# Altium PCB DRTC_V2.PcbDoc
Units mm, origin at the board's own origin, x right, y up, seen from the top; angles counter-clockwise.
Board outline 46 x 80.7 mm, 2 copper layers (Top Layer, Bottom Layer); 27 components, 41 nets, 144 pads, 7 vias.
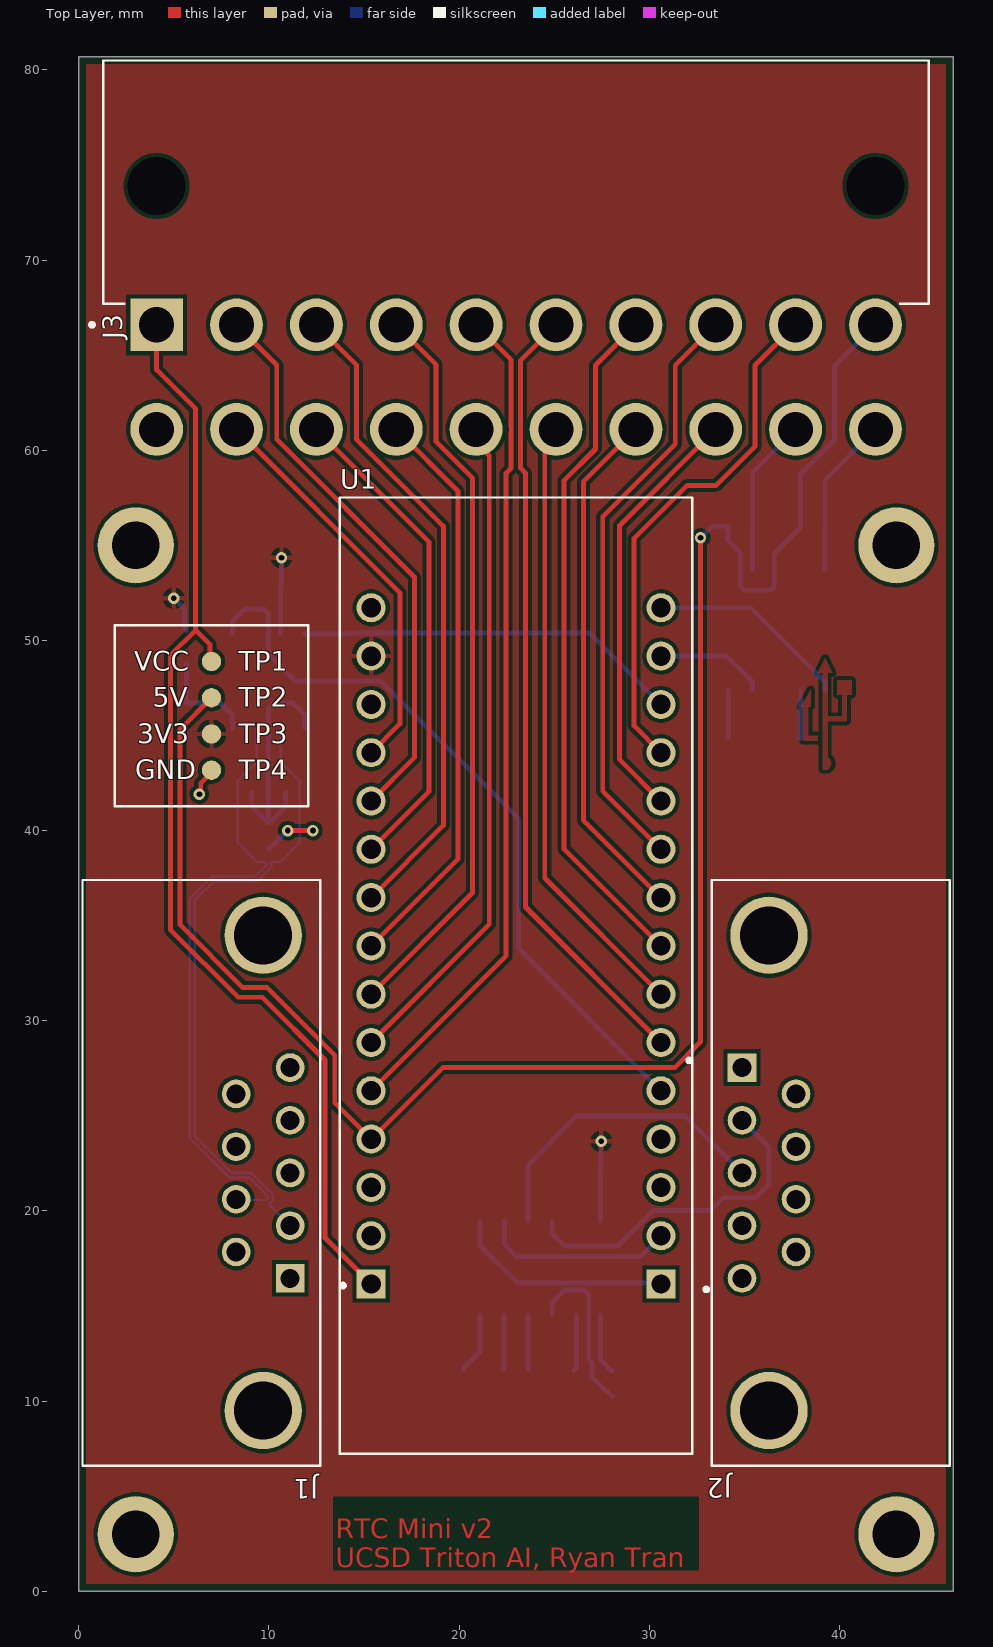
[diagram p0: Top Layer view]
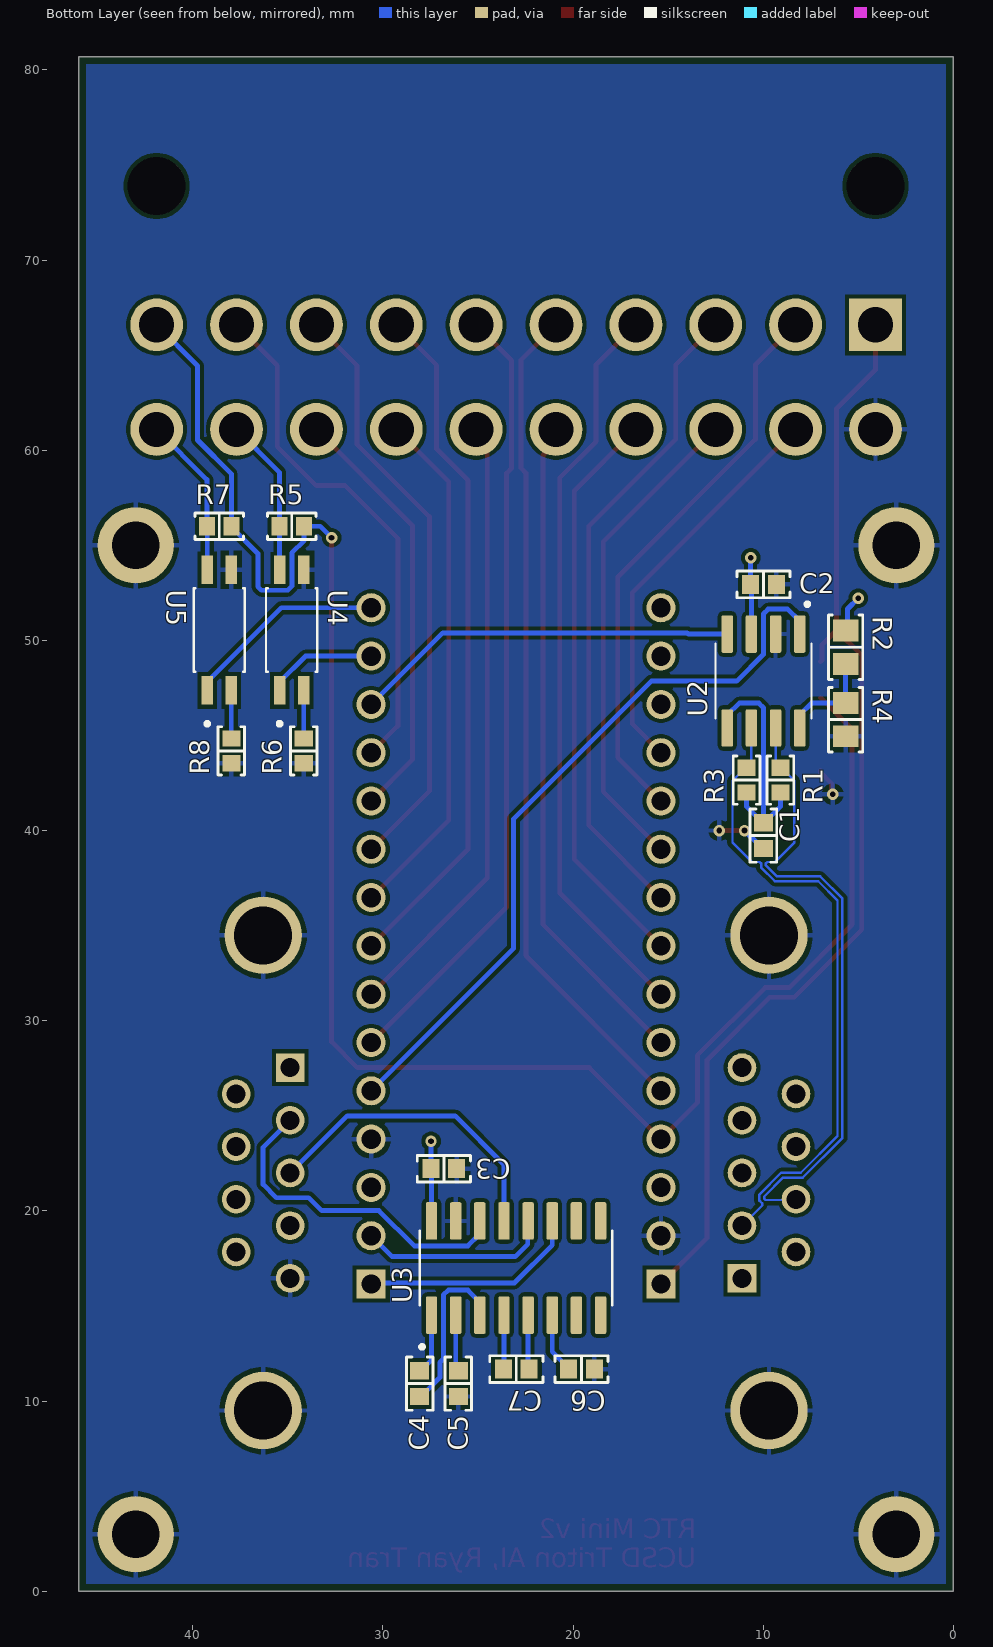
[diagram p1: Bottom Layer view, seen from below]
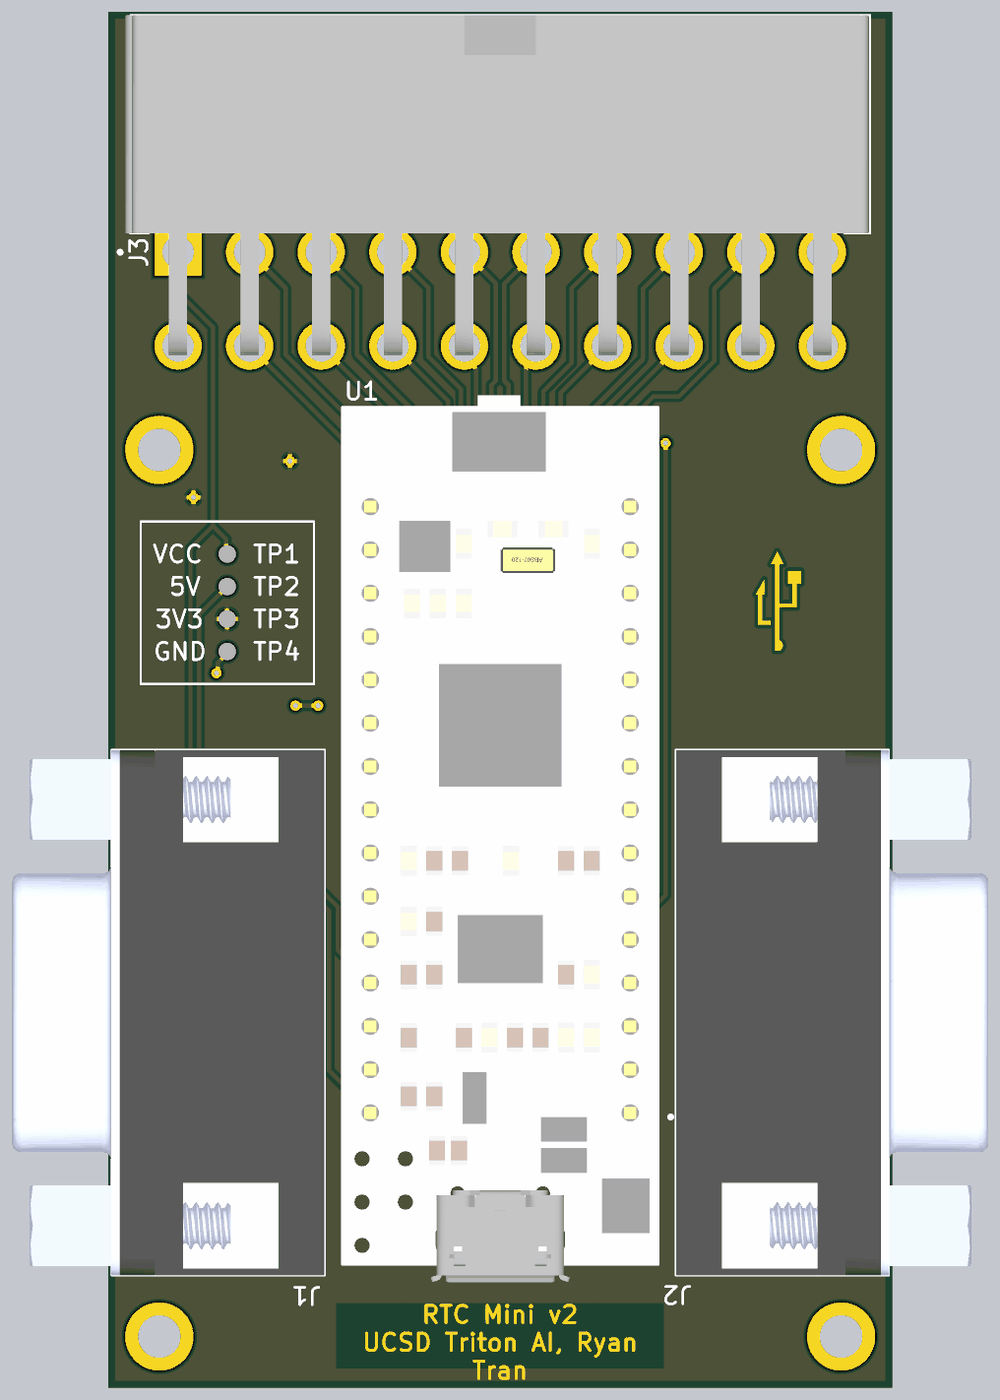
[diagram p2: 3D render of the assembled board from above, using the file's embedded part models]
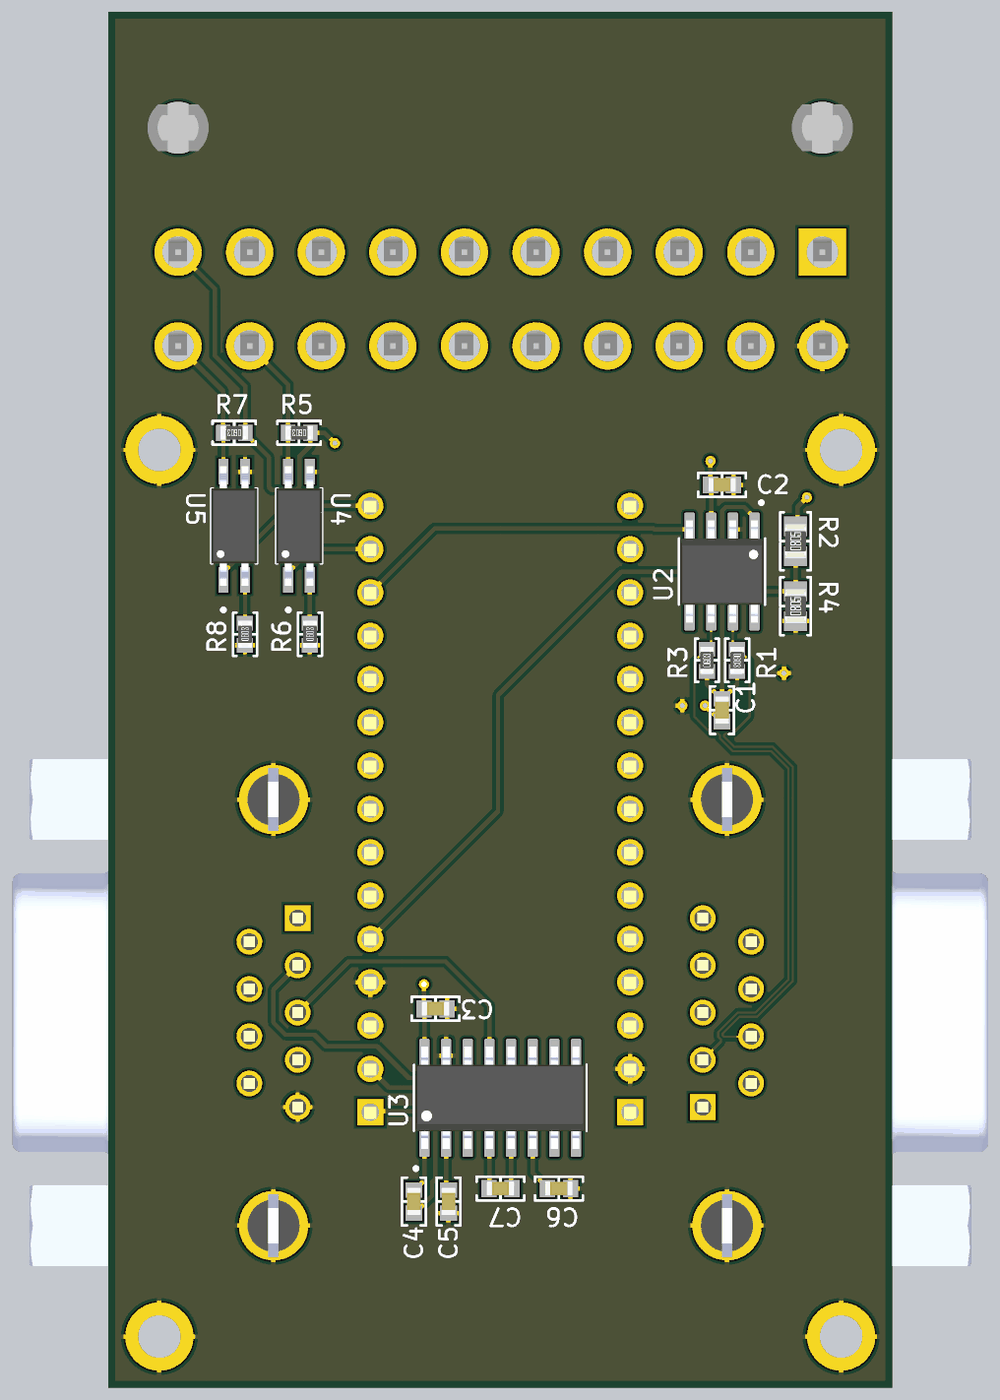
[diagram p3: 3D render of the assembled board from below, using the file's embedded part models]

## Layer stack, top to bottom
Top Solder: solder mask 0.0102, Solder Resist, Dk 3.5
Top Layer: signal copper 0.0356
Dielectric 1: dielectric 0.32, FR-4, Dk 4.5
Bottom Layer: signal copper 0.0356
Bottom Solder: solder mask 0.0102, Solder Resist, Dk 3.5

## Board outline
0,0 46,0 46,80.7 0,80.7

## Design rules (kind name [scope] priority, off if disabled: settings)
Clearance [All] p1: gap=0.2 ignorepadtopadclearanceinfootprint=FALSE except(0.127: Arc-Arc Arc-Track Track-Track SMDPad-SMDPad; 0.15: Arc-Text Track-Text SMDPad-Text THPad-Text Via-Text Fill-Text Poly-Text Region-Text Text-Text; 0.254: Arc-Via Arc-Hole Track-Via Track-Hole Via-Via; 0.33: Arc-THPad Track-THPad; 0.5: THPad-THPad)
DiffPairsRouting DiffPair_DIFF120DiffPairsRouting [InDifferentialPairClass('DIFF120')] p1: maxlimit=0.127 minlimit=0.127 mostfreqgap=0.127 toplayer_minwidth=0.127 toplayer_maxwidth=0.127 toplayer_prefwidth=0.127 bottomlayer_minwidth=0.127 bottomlayer_maxwidth=0.127 bottomlayer_prefwidth=0.127 maxuncoupledlength=12.7
DiffPairsRouting [All] p2: maxlimit=0.254 minlimit=0.127 mostfreqgap=0.254 toplayer_minwidth=0.127 toplayer_maxwidth=0.381 toplayer_prefwidth=0.381 bottomlayer_minwidth=0.127 bottomlayer_maxwidth=0.381 bottomlayer_prefwidth=0.381 maxuncoupledlength=12.7
HoleToHoleClearance [All] p1: gap=0.5 allowstackedmicrovias=TRUE
MatchedLengths DiffPair_DIFF120MatchedLengths [InDifferentialPairClass('DIFF120')] p1: tolerance=25.4 checknetsindiffpair=FALSE checkdiffpairvsdiffpair=TRUE checkxsignals=TRUE checkothers=TRUE
PolygonConnect [All] p1: connectstyle=Relief reliefconductorwidth=0.254 reliefentries=4 polygonreliefangle="90 Angle" airgapwidth=0.254
RoutingVias [All] p1: holewidth=0.3 width=0.6 viastyle="Through Hole" minholewidth=0.3 minwidth=0.6 maxholewidth=6.3 maxwidth=6.3
SilkToSolderMaskClearance [IsPad] p1: minsilkscreentomaskgap=0.15 clearancetoexposedcopper=TRUE
SolderMaskExpansion [All] p1: expansion=0.102 istentingtop=FALSE
Width [All] p1: maxlimit=0.508 minlimit=0.127 preferedwidth=0.254
27 further rules are at their usual default settings.

## Classes and differential pairs
differential pair CAN: +CAN_P -CAN_N

## Components (designator, comment, footprint, x,y, rotation, side; value= is the part's Value field where it differs from the comment)
C1 "4700pF" "CAP 0603_1608" 9.989,39.741 r270 bottom
C2 "0.1µF" "CAP 0603_1608" 9.989,52.949 r0 bottom
C3 "0.1µF" "CAP 0603_1608" 26.797,22.225 r0 bottom
C4 "0.1µF" "CAP 0603_1608" 28.067,10.922 r90 bottom
C5 "0.1µF" "CAP 0603_1608" 26.035,10.922 r90 bottom
C6 "0.1µF" "CAP 0603_1608" 19.558,11.684 r0 bottom
C7 "0.1µF" "CAP 0603_1608" 22.987,11.684 r0 bottom
J1 "A-DF_09_A/KG-T2S" ASSMANN_A-DF09A/KG-T2S 9.7,22 r270 top
J2 "A-DF_09_A/KG-T2S" ASSMANN_A-DF09A/KG-T2S 36.3,22 r90 top
J3 "0039301200" MOLEX_0039301200 23,67.5 r180 top
R1 "60.4 Ohms" "RES 0603_1608" 9.1,42.662 r270 bottom
R2 "=Value" "RES 0805_2012" 5.671,49.647 r90 bottom
R3 "60.4 Ohms" "RES 0603_1608" 10.878,42.662 r90 bottom
R4 "=Value" "RES 0805_2012" 5.671,45.837 r90 bottom
R5 "4.7 kOhms" "RES 0603_1608" 34.798,56.007 r0 bottom
R6 "200 Ohms" "RES 0603_1608" 34.163,44.196 r90 bottom
R7 "4.7 kOhms" "RES 0603_1608" 38.608,56.007 r0 bottom
R8 "200 Ohms" "RES 0603_1608" 37.973,44.196 r90 bottom
TP1 "Testpoint1" TESTPOINT40 6.985,48.895 r90 top
TP2 "Testpoint1" TESTPOINT40 6.985,46.99 r90 top
TP3 "Testpoint1" TESTPOINT40 6.985,45.085 r90 top
TP4 "Testpoint1" TESTPOINT40 6.985,43.18 r90 top
U1 "NUCLEO-L432KC" MODULE_NUCLEO-L432KC 23,32.375 r180 top
U2 "SN65HVD230DR" SOIC127P599X175-8N 9.989,47.869 r270 bottom
U3 "MAX3232IDR" SOIC127P600X175-16N 23,17 r90 bottom
U4 "EL3H7(B)(TA)-VG" SOIC127P700X200-4N 34.798,50.546 r90 bottom
U5 "EL3H7(B)(TA)-VG" SOIC127P700X200-4N 38.608,50.546 r90 bottom

## Footprints (in the part's own frame and the unit in brackets; to place one, negate y for a bottom-side part, rotate by r counter-clockwise, add the part's x,y. Pads: shape width x height; smd on the part's side, far side on the other; paste and mask are expansions set on the pad)
ASSMANN_A-DF09A/KG-T2S [mm]
  rect 1.508x1.508 hole 1: 1(5.54,1.42)
  round 1.508 hole 1: 2(2.77,1.42) 3(0,1.42) 4(-2.77,1.42) 5(-5.54,1.42) 6(4.155,-1.42) 7(1.385,-1.42) 8(-1.385,-1.42) 9(-4.155,-1.42)
  round 4.066 hole 3.05: S1(-12.495,0) S2(12.495,0)
  silkscreen extent -15.41,-9.5 15.41,4.3, body extent -15.41,-15.32 15.41,2.98, height 12.55
"CAP 0603_1608" [mm] "Chip Capacitor, 2-Leads, Body 1.60x0.80mm, IPC Medium Density"
  rect 0.9x1 smd: 1(-0.675,0) 2(0.675,0)
  silkscreen extent -1.4,-0.7 1.4,0.7, body extent -0.8,-0.41 0.8,0.41, height 0.82
MODULE_NUCLEO-L432KC [mm]
  rect 1.53x1.53 hole 1.02: CN3_1(-7.62,16.215) CN4_1(7.62,16.215)
  round 1.53 hole 1.02: CN3_2(-7.62,13.675) CN3_3(-7.62,11.135) CN3_4(-7.62,8.595) CN3_5(-7.62,6.055) CN3_6(-7.62,3.515) CN3_7(-7.62,0.975) CN3_8(-7.62,-1.565) CN3_9(-7.62,-4.105) CN3_10(-7.62,-6.645) CN3_11(-7.62,-9.185) CN3_12(-7.62,-11.725) CN3_13(-7.62,-14.265) CN3_14(-7.62,-16.805) CN3_15(-7.62,-19.345) CN4_2(7.62,13.675) CN4_3(7.62,11.135) CN4_4(7.62,8.595) CN4_5(7.62,6.055) CN4_6(7.62,3.515) CN4_7(7.62,0.975) CN4_8(7.62,-1.565) CN4_9(7.62,-4.105) CN4_10(7.62,-6.645) CN4_11(7.62,-9.185) CN4_12(7.62,-11.725) CN4_13(7.62,-14.265) CN4_14(7.62,-16.805) CN4_15(7.62,-19.345)
  silkscreen extent -10.1,-25.14 9.27,25.14, body extent -9.27,-25.82 9.27,26.19, height 6.26
MOLEX_0039301200 [mm]
  rect 2.775x2.775 hole 1.85: 1(18.9,0.9)
  round 2.775 hole 1.85: 2(14.7,0.9) 3(10.5,0.9) 4(6.3,0.9) 5(2.1,0.9) 6(-2.1,0.9) 7(-6.3,0.9) 8(-10.5,0.9) 9(-14.7,0.9) 10(-18.9,0.9) 11(18.9,6.4) 12(14.7,6.4) 13(10.5,6.4) 14(6.3,6.4) 15(2.1,6.4) 16(-2.1,6.4) 17(-6.3,6.4) 18(-10.5,6.4) 19(-14.7,6.4) 20(-18.9,6.4)
  round 3 hole 3.05 unplated: ""(-18.9,-6.4) ""(18.9,-6.4)
  silkscreen extent -21.7,-13 22.4,1, body extent -21.6,-13 22,6.94, height 11.4
"RES 0603_1608" [mm] "Chip Resistor, 2-Leads, Body 1.60x0.80mm, IPC Medium Density"
  rect 0.85x0.95 smd: 1(-0.65,0) 2(0.65,0)
  silkscreen extent -1.27,-0.7 1.27,0.7, body extent -0.8,-0.4 0.8,0.4, height 0.45
"RES 0805_2012" [mm] "Chip Resistor, 2-Leads, Body 2.00x1.25mm, IPC Medium Density"
  rect 1.15x1.35 smd: 1(-0.875,0) 2(0.875,0)
  silkscreen extent -1.7,-0.9 1.7,0.9, body extent -1,-0.62 1,0.63, height 0.6
SOIC127P599X175-8N [mm]
  rrect25% 1.97x0.6 smd: 1(-2.47,1.905) 2(-2.47,0.635) 3(-2.47,-0.635) 4(-2.47,-1.905) 5(2.47,-1.905) 6(2.47,-0.635) 7(2.47,0.635) 8(2.47,1.905)
  silkscreen extent -4.14,-2.52 1.95,2.52, body extent -3,-2.45 3,2.45, height 1.75
SOIC127P600X175-16N [mm]
  rrect25% 1.97x0.6 smd: 1(-2.475,4.445) 2(-2.475,3.175) 3(-2.475,1.905) 4(-2.475,0.635) 5(-2.475,-0.635) 6(-2.475,-1.905) 7(-2.475,-3.175) 8(-2.475,-4.445) 9(2.475,-4.445) 10(2.475,-3.175) 11(2.475,-1.905) 12(2.475,-0.635) 13(2.475,0.635) 14(2.475,1.905) 15(2.475,3.175) 16(2.475,4.445)
  silkscreen extent -4.24,-5.06 1.95,5.06, body extent -3,-4.95 3,4.95, height 1.75
SOIC127P700X200-4N [mm]
  rect 1.5x0.6 smd: 1(-3.175,0.635) 2(-3.175,-0.635) 3(3.175,-0.635) 4(3.175,0.635)
  silkscreen extent -5.02,-1.35 2.2,1.35, body extent -3.5,-1.35 3.5,1.35, height 2
TESTPOINT40 [mil]
  round 40 smd: 1(0,0)

## Part data
C1: library part CGA3E2X7R1H472K080AA, "CAP CER 4700PF 50V X7R 0603", Device Package="0603 (1608 Metric)", Manufacturer="TDK Corporation", Operating Temperature="-55°C ~ 125°C", Ratings=AEC-Q200, Supplier Part Number 1=445-5661-1-ND, Temperature Coefficient=X7R, Tolerance=±10%, Voltage - Rated=50V, Applications=Automotive, Capacitance=4700pF, ComponentLink1Description=Datasheet, ComponentLink1URL=https://product.tdk.com/info/en/catalog/datasheets/mlcc_automotive_general_en.pdf?ref_disty=digikey, ComponentLink2Description="DigiKey Link", ComponentLink2URL=http://digikey.com/product-detail/en/tdk-corporation/CGA3E2X7R1H472K080AA/445-5661-1-ND/2443701, LastUpdated="9/2/2020 1:03:30 AM", Lifecycle Status=Active, Minimum Order=1, Mounting Type="Surface Mount, MLCC", Package / Case="0603 (1608 Metric)", Packaging=TapeAndReel, Part Number=CGA3E2X7R1H472K080AA, Part Status=Active, PartId=5842, Price=0.01, Series=CGA, Size / Dimension="0.063\" L x 0.031\" W (1.60mm x 0.80mm)", Supplier 1=DigiKey, Thickness (Max)="0.035\" (0.90mm)"
C2 C3 C4 C5 C6 C7: library part CL10B104KA8NNNC, "CAP CER 0.1UF 25V X7R 0603", Device Package="0603 (1608 Metric)", Manufacturer="Samsung Electro-Mechanics", Operating Temperature="-55°C ~ 125°C", Supplier Part Number 1=1276-1006-1-ND, Temperature Coefficient=X7R, Tolerance=±10%, Voltage - Rated=25V, Applications="General Purpose", Capacitance=0.1µF, ComponentLink1Description=Datasheet, ComponentLink1URL=http://www.samsungsem.com/kr/support/product-search/mlcc/CL10B104KA8NNNC.jsp, ComponentLink2Description="DigiKey Link", ComponentLink2URL=http://digikey.com/product-detail/en/samsung-electro-mechanics/CL10B104KA8NNNC/1276-1006-1-ND/3889092, LastUpdated="9/2/2020 1:03:22 AM", Lifecycle Status=Active, Minimum Order=1, Mounting Type="Surface Mount, MLCC", Package / Case="0603 (1608 Metric)", Packaging=TapeAndReel, Part Number=CL10B104KA8NNNC, Part Status=Active, PartId=9793, Price=0.01, Series=CL, Size / Dimension="0.063\" L x 0.031\" W (1.60mm x 0.80mm)", Supplier 1=DigiKey, Thickness (Max)="0.035\" (0.90mm)"
J1 J2: "Conn D-Subminiature F 9 POS 2.77mm Solder RA Thru-Hole 9 Terminal 1 Port", Package=None, Availability=Unavailable, MF="{'manufacturer': u'Assmann WSW'}", MP=A-DF_09_A/KG-T2S, Price=None
J3: "Connector Header Through Hole, Right Angle 20 position 0.165\" (4.20mm)"
R1 R3: library part RMCF0603FT60R4, "RES 60.4 OHM 1% 1/10W 0603", Device Package="0603 (1608 Metric)", Manufacturer="Stackpole Electronics Inc", Operating Temperature="-55°C ~ 155°C", Power (Watts)="0.1W, 1/10W", Ratings=AEC-Q200, Supplier Device Package=0603, Supplier Part Number 1=RMCF0603FT60R4CT-ND, Temperature Coefficient=±100ppm/°C, Tolerance=±1%, ComponentLink1Description=Datasheet, ComponentLink1URL=https://www.seielect.com/catalog/sei-rmcf_rmcp.pdf, ComponentLink2Description="DigiKey Link", ComponentLink2URL=http://digikey.com/product-detail/en/stackpole-electronics-inc/RMCF0603FT60R4/RMCF0603FT60R4CT-ND/2418105, Composition="Thick Film", Features="Automotive AEC-Q200", Height - Seated (Max)="0.022\" (0.55mm)", LastUpdated="9/2/2020 1:10:13 AM", Lifecycle Status=Active, Minimum Order=1, Number of Terminations=2, Package / Case="0603 (1608 Metric)", Packaging=CutTape, Part Number=RMCF0603FT60R4, Part Status=Active, PartId=10803, Price=0.10, Resistance="60.4 Ohms", Series=RMCF, Size / Dimension="0.061\" L x 0.031\" W (1.55mm x 0.80mm)", Supplier 1=DigiKey
R2 R4: library part CRCW08050000Z0EAC, "RES SMD 0 OHM JUMP 1/8W 0805", Device Package="0805 (2012 Metric)", Manufacturer="Vishay Dale", Operating Temperature="-55°C ~ 155°C", Power (Watts)="0.125W, 1/8W", Supplier Device Package=0805, Supplier Part Number 1=541-4125-1-ND, Tolerance=Jumper, ComponentLink1Description=Datasheet, ComponentLink1URL=http://www.vishay.com/docs/28773/crcwce3.pdf, ComponentLink2Description="DigiKey Link", ComponentLink2URL=http://digikey.com/product-detail/en/vishay-dale/CRCW08050000Z0EAC/541-4125-1-ND/7928808, Composition="Thick Film", Height - Seated (Max)="0.024\" (0.60mm)", LastUpdated="9/2/2020 1:15:03 AM", Lifecycle Status=Active, Minimum Order=1, Number of Terminations=2, Package / Case="0805 (2012 Metric)", Packaging=CutTape, Part Number=CRCW08050000Z0EAC, Part Status=Active, PartId=37138, Price=0.10, Series=CRCW-C, Size / Dimension="0.079\" L x 0.049\" W (2.00mm x 1.25mm)", Supplier 1=DigiKey
R5 R7: library part RC0603FR-074K7L, "RES SMD 4.7K OHM 1% 1/10W 0603", Device Package="0603 (1608 Metric)", Manufacturer=Yageo, Operating Temperature="-55°C ~ 155°C", Power (Watts)="0.1W, 1/10W", Supplier Device Package=0603, Supplier Part Number 1=311-4.70KHRCT-ND, Temperature Coefficient=±100ppm/°C, Tolerance=±1%, ComponentLink1Description=Datasheet, ComponentLink1URL=https://www.yageo.com/upload/media/product/productsearch/datasheet/rchip/PYu-RC_Group_51_RoHS_L_10.pdf, ComponentLink2Description="DigiKey Link", ComponentLink2URL=http://digikey.com/product-detail/en/yageo/RC0603FR-074K7L/311-4.70KHRCT-ND/730159, Composition="Thick Film", Features="Moisture Resistant", Height - Seated (Max)="0.022\" (0.55mm)", LastUpdated="9/2/2020 1:09:40 AM", Lifecycle Status=Active, Minimum Order=1, Number of Terminations=2, Package / Case="0603 (1608 Metric)", Packaging=CutTape, Part Number=RC0603FR-074K7L, Part Status=Active, PartId=23949, Price=0.10, Resistance="4.7 kOhms", Series=RC, Size / Dimension="0.063\" L x 0.031\" W (1.60mm x 0.80mm)", Supplier 1=DigiKey
R6 R8: library part RMCF0603JT200R, "RES 200 OHM 5% 1/10W 0603", Device Package="0603 (1608 Metric)", Manufacturer="Stackpole Electronics Inc", Operating Temperature="-55°C ~ 155°C", Power (Watts)="0.1W, 1/10W", Ratings=AEC-Q200, Supplier Device Package=0603, Supplier Part Number 1=RMCF0603JT200RCT-ND, Temperature Coefficient=±200ppm/°C, Tolerance=±5%, ComponentLink1Description=Datasheet, ComponentLink1URL=https://www.seielect.com/catalog/sei-packaging.pdf, ComponentLink2Description="DigiKey Link", ComponentLink2URL=http://digikey.com/product-detail/en/stackpole-electronics-inc/RMCF0603JT200R/RMCF0603JT200RCT-ND/1943161, Composition="Thick Film", Features="Automotive AEC-Q200", Height - Seated (Max)="0.022\" (0.55mm)", LastUpdated="9/2/2020 1:09:32 AM", Lifecycle Status=Active, Minimum Order=1, Number of Terminations=2, Package / Case="0603 (1608 Metric)", Packaging=CutTape, Part Number=RMCF0603JT200R, Part Status=Active, PartId=25410, Price=0.10, Resistance="200 Ohms", Series=RMCF, Size / Dimension="0.061\" L x 0.031\" W (1.55mm x 0.80mm)", Supplier 1=DigiKey
TP1 TP2 TP3 TP4: "Testpoint 40mil pad"
U1: "STM32 Nucleo-32 development board with STM32L432KC MCU, supports Arduino connectivity", Package=None, Availability=Unavailable, MF="{'manufacturer': u'STMicroelectronics'}", MP=NUCLEO-L432KC, Price=None
U2: "3.3 V CAN Transceiver with Standby Mode 8-SOIC -40 to 85", Package=None, Availability=Unavailable, MF="{'manufacturer': u'Texas Instruments'}", MP=SN65HVD230DR, Price=None
U3: "3-V to 5.5-V multichannel RS-232 line driver & receiver 16-SOIC -40 to 85", Package=None, Availability=Unavailable, MF="{'manufacturer': u'Texas Instruments'}", MP=MAX3232IDR, Price=None
U4 U5: "Optoisolator Transistor Output 3750Vrms 1 Channel 4-SSOP", Package=None, Availability=Unavailable, MF="{'manufacturer': u'Everlight Electronics'}", MP=EL3H7-G, Price=None

## Free pads (board coordinates)
  round 4 hole 2.5: ""(3,3) ""(3,55) ""(43,3) ""(43,55)

## Via types
v1: diameter 0.6, hole 0.3, Top Layer to Bottom Layer, 7 vias

## Nets (pads, with @x,y where several pads share a name; then routed paths per layer and width w, separated by ;. In a path a pad name is that pad's centre, name@x,y a point inside that pad or via, vN(x,y) a via of type N, cw(c..) or ccw(c..) an arc to the next point about the centre after c; other vN are vias at no path point)
3V3: C2.2 C3.2 R2.2 TP3.1 U1.CN4_14 U2.3 U3.16 | length 10.2
  Bottom Layer w0.254: v1(5.004,52.222) 5.571,51.655 5.571,50.622 R2.2 ; U2.3 10.624,52.909 C2.2 v1(10.664,54.352) ; U3.16 27.445,22.198 C3.2 v1(27.472,23.662)
5V: J3.10 R5.1 R7.1 TP2.1 U1.CN4_4 | length 97.7
  Top Layer w0.254: TP2.1 5.334,45.339 5.334,35.052 8.636,31.75 9.906,31.75 13.462,28.194 13.462,25.698 U1.CN4_4 19.142,27.542 31.352,27.542 32.7,28.89 v1(32.7,55.4)
  Bottom Layer w0.254: v1(32.7,55.4) 33.307,56.007 R5.1 ; R5.1@34.148,55.957 34.148,55.248 34.79,54.606 34.79,52.852 34.998,52.644 36.388,52.644 36.576,52.832 36.576,54.575 37.958,55.957 R7.1 37.958,58.749 39.751,60.542 39.751,64.451 J3.10
A0: J3.12 U1.CN4_12 | length 21.2
  Top Layer w0.254: J3.12 16.891,52.509 16.891,45.611 U1.CN4_12
A1: J3.2 U1.CN4_11 | length 29.9
  Top Layer w0.254: J3.2 10.414,64.486 10.414,60.577 17.653,53.338 17.653,43.833 U1.CN4_11
A2: J3.13 U1.CN4_10 | length 25.8
  Top Layer w0.254: J3.13 18.415,55.185 18.415,42.055 U1.CN4_10
A3: J3.3 U1.CN4_9 | length 34.5
  Top Layer w0.254: J3.3 14.605,64.495 14.605,60.586 19.177,56.014 19.177,40.277 U1.CN4_9
A4: J3.14 U1.CN4_8 | length 30.4
  Top Layer w0.254: U1.CN4_8 19.939,38.499 19.939,57.861 J3.14
A5: J3.4 U1.CN4_7 | length 39.1
  Top Layer w0.254: U1.CN4_7 20.701,36.721 20.701,58.547 18.796,60.452 18.796,64.504 J3.4
A6: J3.15 U1.CN4_6 | length 35.1
  Top Layer w0.254: U1.CN4_6 21.59,35.07 21.59,59.728 20.9,60.418 J3.15
A7: J3.5 U1.CN4_5 | length 44.1
  Top Layer w0.254: U1.CN4_5 22.479,33.419 22.479,58.801 22.733,59.055 22.733,60.894 ccw(c20.9,61.1) 22.733,61.306 22.733,64.767 22.659,64.841 J3.5
CAN_N: J1.2 R3.2 U2.6 | length 33.3
  Bottom Layer w0.127: U2.6 10.624,43.566 R3.2 10.928,43.312 11.616,42.623 11.616,39.371 10.598,38.352 10.19,38.352 10.116,38.278 10.116,38.068 9.386,37.338 7.112,37.338 6.096,36.322 6.096,23.946 8.033,22.009 9.059,22.009 10.204,20.864 10.204,20.549 10.055,20.4 10.055,20.295 J1.2
CAN_P: J1.7 R1.1 U2.7 | length 33.1
  Bottom Layer w0.127: J1.7 8.316,20.579 9.876,20.579 9.95,20.654 9.95,20.759 8.954,21.755 7.928,21.755 5.842,23.841 5.842,36.427 7.007,37.592 9.281,37.592 9.862,38.173 9.862,38.278 9.788,38.352 9.38,38.352 8.361,39.371 8.361,42.624 9.05,43.312 R1.1 9.354,43.566 U2.7
CAN_RX: U1.CN3_13 U2.4 | length 20.3
  Bottom Layer w0.254: U2.4 13.945,50.339 14.008,50.402 26.858,50.402 U1.CN3_13
CAN_TX: U1.CN3_5 U2.1 | length 39.2
  Bottom Layer w0.254: U2.1 8.084,51.024 8.711,51.651 9.746,51.651 9.989,51.408 9.989,49.27 11.397,47.862 15.886,47.862 23.131,40.617 23.131,33.809 U1.CN3_5
D3: J3.6 U1.CN3_6 | length 41.6
  Top Layer w0.254: J3.6 23.241,64.741 23.241,59.055 23.495,58.801 23.495,35.985 U1.CN3_6
D4: J3.16 U1.CN3_7 | length 32.5
  Top Layer w0.254: J3.16 25.1,60.418 24.511,59.829 24.511,37.509 U1.CN3_7
D5: J3.7 U1.CN3_8 | length 36.3
  Top Layer w0.254: J3.7 27.178,64.478 27.178,60.071 25.527,58.42 25.527,39.033 U1.CN3_8
D6: J3.17 U1.CN3_9 | length 27.5
  Top Layer w0.254: J3.17 26.543,58.343 26.543,40.557 U1.CN3_9
D7: J3.8 U1.CN3_10 | length 31.3
  Top Layer w0.254: U1.CN3_10 27.559,42.081 27.559,56.515 31.369,60.325 31.369,64.469 J3.8
D8: J3.18 U1.CN3_11 | length 22.5
  Top Layer w0.254: U1.CN3_11 28.448,43.732 28.448,56.048 J3.18
D9: J3.9 U1.CN3_12 | length 27.5
  Top Layer w0.254: U1.CN3_12 29.21,45.51 29.21,55.372 31.984,58.146 33.508,58.146 35.56,60.198 35.56,64.46 J3.9
D11: U1.CN3_14 U4.1 | length 5.8
  Bottom Layer w0.254: U1.CN3_14 34.074,49.18 35.433,47.821 U4.1
D12: U1.CN3_15 U5.1 | length 10.7
  Bottom Layer w0.254: U1.CN3_15 35.344,51.72 39.243,47.821 U5.1
GND: C1.2 C2.1 C3.1 C5.1 C6.1 J1.S1 J1.S2 J2.5 J2.S1 J2.S2 J3.11 pad. R4.1 R6.1 R8.1 TP4.1 U1.CN3_4 U1.CN4_2 U2.2 U3.15 U4.3 U5.3 | length 4.3
  Top Layer w0.254: v1(6.35,41.91) 6.416,41.976 6.416,42.492 6.985,43.06 TP4.1 ; v1(10.989,40.005) v1(12.319,40.005)
  Bottom Layer w0.254: C1.2 10.039,39.066 10.612,39.639 10.624,39.639 10.989,40.004 v1(10.989,40.005)
NetC1_1: C1.1 R1.2 R3.1 U2.5 | length 13
  Bottom Layer w0.254: R1.2 9.1,41.255 9.939,40.416 C1.1 ; R3.1 10.878,41.255 10.039,40.416 C1.1 ; U2.5 11.894,46.084 11.267,46.711 10.232,46.711 9.989,46.468 C1.1
NetC4_1: C4.1 U3.3 | length 8.9
  Bottom Layer w0.254: U3.3 24.905,15.21 25.532,15.837 26.567,15.837 26.818,15.586 26.818,12.226 26.999,12.045 26.999,11.253 27.682,10.57 27.744,10.57 C4.1
NetC4_2: C4.2 U3.1 | length 3.2
  Bottom Layer w0.254: U3.1 27.445,12.169 28.017,11.597 C4.2
NetC5_2: C5.2 U3.2 | length 3
  Bottom Layer w0.254: C5.2 26.175,11.737 U3.2
NetC6_2: C6.2 U3.6 | length 3.2
  Bottom Layer w0.254: C6.2 20.233,11.734 21.095,12.596 U3.6
NetC7_1: C7.1 U3.5 | length 2.9
  Bottom Layer w0.254: C7.1 22.365,11.737 U3.5
NetC7_2: C7.2 U3.4 | length 2.9
  Bottom Layer w0.254: U3.4 23.635,11.711 C7.2
NetJ2_2: J2.2 U3.14 | length 17.6
  Bottom Layer w0.254: U3.14 24.905,18.79 25.532,18.163 28.355,18.163 30.21,20.018 33.218,20.018 33.9,20.7 35.6,20.7 36.3,21.4 36.3,23.35 J2.2
NetJ2_3: J2.3 U3.13 | length 16.5
  Bottom Layer w0.254: U3.13 23.635,22.435 26.202,25.002 31.878,25.002 J2.3
NetJ3_19: J3.19 R5.2 U4.4 | length 8.3
  Bottom Layer w0.254: U4.4 35.433,55.992 R5.2 35.448,58.848 J3.19
NetJ3_20: J3.20 R7.2 U5.4 | length 8.5
  Bottom Layer w0.254: U5.4 39.243,55.992 R7.2 39.258,58.458 J3.20
NetR2_1: R2.1 R4.2 U2.8 | length 5.4
  Bottom Layer w0.254: R2.1 R4.2 7.456,46.712 8.084,46.084 U2.8
NetR6_2: R6.2 U4.2 | length 2.5
  Bottom Layer w0.254: R6.2 U4.2
NetR8_2: R8.2 U5.2 | length 2.5
  Bottom Layer w0.254: R8.2 U5.2
RS232_RX: U1.CN3_2 U3.12 | length 10.2
  Bottom Layer w0.254: U3.12 22.385,19.455 22.385,18.258 23.043,17.6 29.52,17.6 U1.CN3_2
RS232_TX: U1.CN3_1 U3.11 | length 11.6
  Bottom Layer w0.254: U3.11 21.095,18.205 23.082,16.218 30.562,16.218 U1.CN3_1
VCC: J3.1 TP1.1 U1.CN4_1 | length 58.9
  Top Layer w0.254: J3.1 4.1,64.226 6.15,62.176 6.15,50.546 ; TP1.1 6.912,48.968 6.912,49.784 6.15,50.546 ; U1.CN4_1 12.954,18.586 12.954,27.94 9.652,31.242 8.382,31.242 4.826,34.798 4.826,49.222 6.15,50.546
pads on no net: J1.1 J1.3 J1.4 J1.5 J1.6 J1.8 J1.9 J2.1 J2.4 J2.6 J2.7 J2.8 J2.9 J3. U1.CN3_3 U1.CN4_3 U1.CN4_13 U1.CN4_15 U3.7 U3.8 U3.9 U3.10

## Polygon pours and split planes (outlines as drawn)
no net on Top Layer "NONET_L01_P001" (solid, pour order 1): 39.379,43.215 ccw(c39.23,43.532) 39.379,43.85 39.379,45.755 40.395,45.755 40.395,47.152 40.649,47.152 40.649,47.914 39.887,47.914 39.887,47.152 40.141,47.152 40.141,46.009 39.379,46.009 39.379,48.295 39.633,48.295 39.252,49.057 38.871,48.295 39.125,48.295 39.125,43.215
no net on Top Layer "NONET_L01_P004" (solid, pour order 4): 38.871,44.739 38.871,44.993 38.363,44.993 38.363,46.517 38.49,46.517 38.49,47.406 37.982,46.517 38.109,46.517 38.109,44.739
3V3 on Top Layer "3V3_L01_P005" (solid, pour order 5): 0.4,80.3 0.4,0.4 45.6,0.4 45.6,80.3
no net on Top Solder "NONET_L01_P008" (solid, pour order 8): 39.379,43.215 ccw(c39.23,43.532) 39.379,43.85 39.379,45.755 40.395,45.755 40.395,47.152 40.649,47.152 40.649,47.914 39.887,47.914 39.887,47.152 40.141,47.152 40.141,46.009 39.379,46.009 39.379,48.295 39.633,48.295 39.252,49.057 38.871,48.295 39.125,48.295 39.125,43.215
no net on Top Solder "NONET_L01_P009" (solid, pour order 9): 38.871,44.739 38.871,44.993 38.363,44.993 38.363,46.517 38.49,46.517 38.49,47.406 37.982,46.517 38.109,46.517 38.109,44.739
GND on Bottom Layer "GND_L02_P000" (solid, pour order 0): 0.4,80.3 0.4,0.4 45.6,0.4 45.6,80.3

## Other copper
Top Layer:
  text "RTC Mini v2 / UCSD Triton AI, Ryan Tran" at 13.525,1.27 h1.02

## Silkscreen, mask and mechanical layers (free items; w line width, h text height)
Top Overlay:
  lines w0.127: 1.905,41.275 12.065,41.275 12.065,50.8 1.905,50.8 1.905,41.275
  text "VCC" at 2.922,48.412 h1.02
  text "5V" at 3.884,46.507 h1.02
  text "3V3" at 3.076,44.602 h1.02
  text "GND" at 2.97,42.697 h1.02
Top Solder:
  text "RTC Mini v2 / UCSD Triton AI, Ryan Tran" at 13.525,1.27 h1.02